# EAGLE board 03-Love-O-Meter (EAGLE 9.7.0)

Size 181.53 x 59.69 mm. Coordinates in mm from the lower left corner, seen from the top.
Outline: 0,0 181.53,0 181.53,59.69 0,59.69 0,0
Copper layers (1*16): Top 0.035mm / dielectric 1.5mm / Bottom 0.035mm
Design rules "default": minimum track width 6mil, minimum drill 0.35mm, track to track 6mil, track to pad 6mil, pad to pad 6mil, via to via 6mil, smd to smd 6mil, copper to edge 40mil, drill to drill 6mil, minimum pad ring 10mil, minimum via ring 8mil, stop-mask expansion 4mil, vias tented up to drill 0mil, thermal gap 10mil

## Footprints (pad centres in the part's own frame; a part is rotated, then mirrored left to right if it is on the bottom)
LEDRD254W60D565H860B = drill 0.981 pad 1.581: 1 -1.27,0; 2 1.27,0
TO92 = drill 0.813 octagon: 1 -1.27,0; 2 0,1.905; 3 1.27,0
ARDUINO-UNO-R3-SHIELD = drill 1.016 pad 1.88: 3.3V 24.13,-2.54; 5V 24.13,0; A0 24.13,12.7; A1 24.13,15.24; A2 24.13,17.78; A3 24.13,20.32; A4 24.13,22.86; A5 24.13,25.4; AREF -24.13,-13.97; D2 -24.13,20.32; D3 -24.13,17.78; D4 -24.13,15.24; D5 -24.13,12.7; D6 -24.13,10.16; D7 -24.13,7.62; D8 -24.13,3.81; D9 -24.13,1.27; D10 -24.13,-1.27; D11 -24.13,-3.81; D12 -24.13,-6.35; D13 -24.13,-8.89; GND@0 24.13,2.54; GND@1 24.13,5.08; GND@2 -24.13,-11.43; IOREF 24.13,-7.62; NC 24.13,-10.16; RES 24.13,-5.08; RX -24.13,25.4; SCL -24.13,-19.05; SDA -24.13,-16.51; TX -24.13,22.86; VIN 24.13,7.62

## Placement (x,y rotation side)
D1  RED  [LEDRD254W60D565H860B]  165.31,41.15 0 top
D3  RED  [LEDRD254W60D565H860B]  155.15,41.15 0 top
D4  RED  [LEDRD254W60D565H860B]  175.47,41.15 0 top
U1  TMP36GT9Z_TO92  [TO92]  138.64,25.91 0 top
ULOVE-O-METER_BOARD  ARDUINO-UNO-R3-SHIELD  [ARDUINO-UNO-R3-SHIELD]  47.88,29.84 270 top

## Library data of the parts
D1 D3 D4 = Tinkercad; CATEGORY: Opto-Electronic; SUB-CATEGORY: LED; VALUE: LED_RED
U1 ULOVE-O-METER_BOARD = Tinkercad

## Nets
ULOVE-O-METER_BOARD_5V: U1.3 ULOVE-O-METER_BOARD.5V
ULOVE-O-METER_BOARD_D2: D3.1 ULOVE-O-METER_BOARD.D2
ULOVE-O-METER_BOARD_D3: D1.1 ULOVE-O-METER_BOARD.D3
ULOVE-O-METER_BOARD_D4: D4.1 ULOVE-O-METER_BOARD.D4
ULOVE-O-METER_BOARD_GND: D1.2 D3.2 D4.2 U1.1 ULOVE-O-METER_BOARD.A0 ULOVE-O-METER_BOARD.GND@0 ULOVE-O-METER_BOARD.GND@1 ULOVE-O-METER_BOARD.GND@2

## Tracks (layer width: path | path; a pad name or v marks a point on that pad's centre or on a via)
ULOVE-O-METER_BOARD_5V  (1 unrouted)
ULOVE-O-METER_BOARD_D2  (1 unrouted)
ULOVE-O-METER_BOARD_D3  (1 unrouted)
ULOVE-O-METER_BOARD_D4  (1 unrouted)
ULOVE-O-METER_BOARD_GND  (7 unrouted)